# Altium PCB шах.PcbDoc
Units mm, origin at the board's own origin, x right, y up, seen from the top; angles counter-clockwise.
Board outline 204.72 x 122.3 mm, 2 copper layers (Top Layer, Bottom Layer); 68 components, 54 nets, 201 pads, 58 vias.
Unrouted connection lines stored in the file: 41.
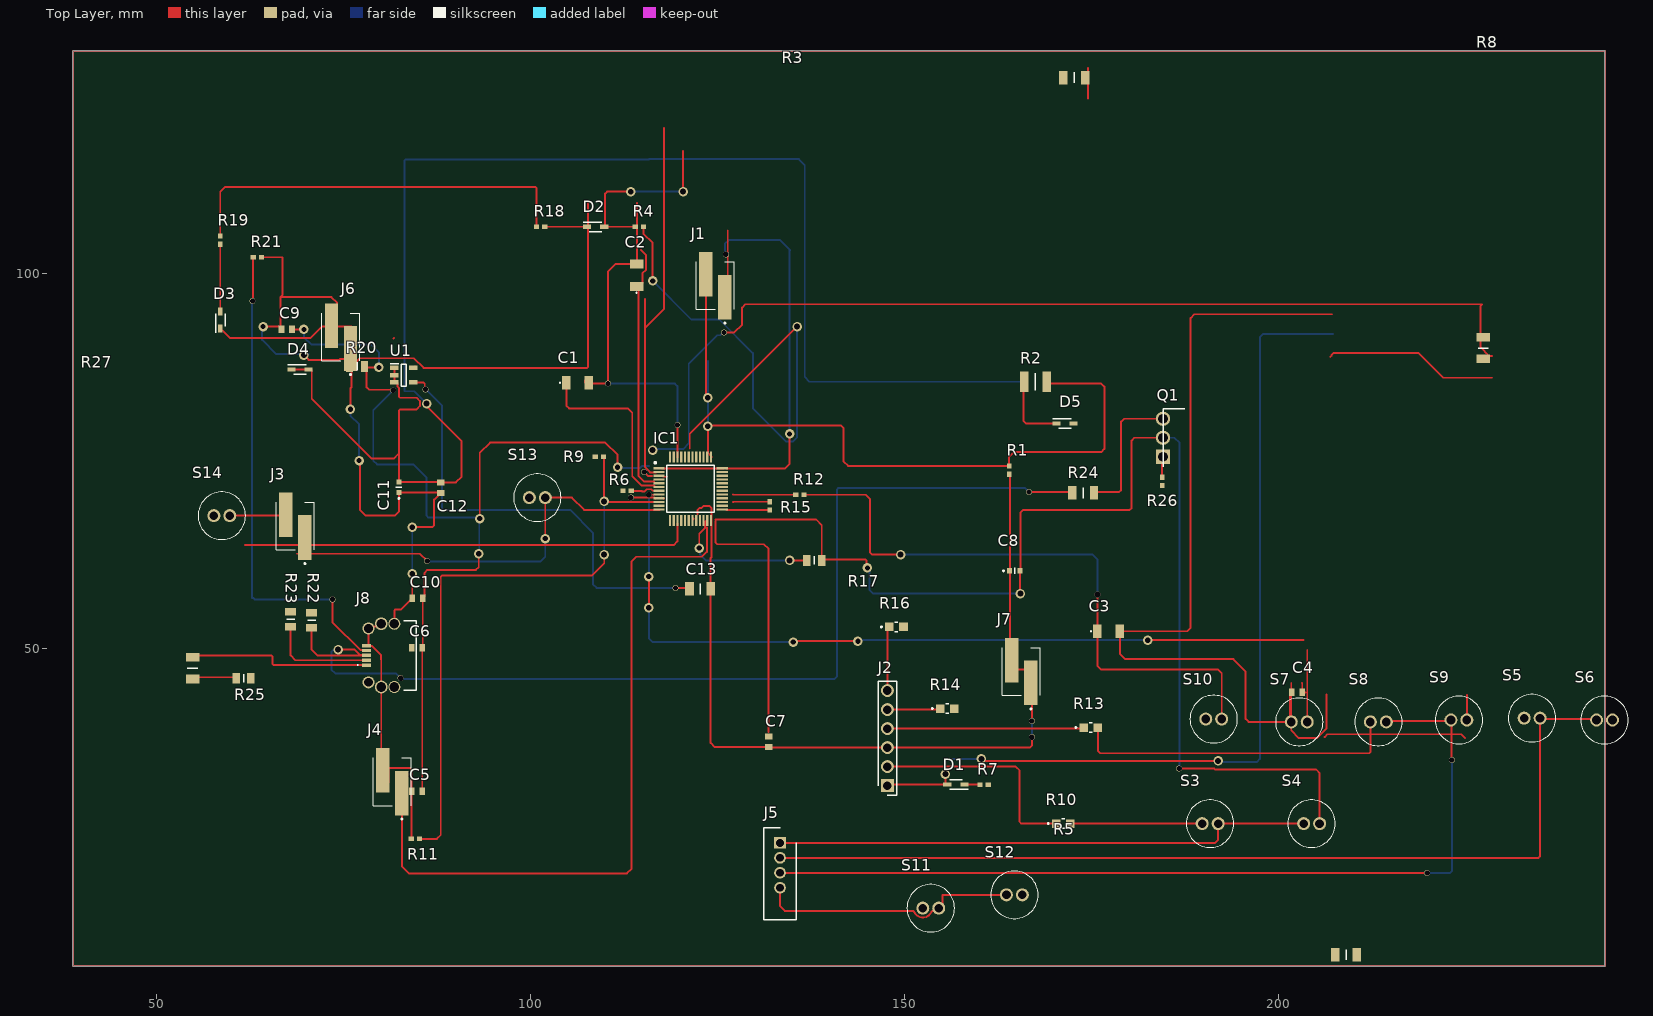
[diagram p0: Top Layer view]
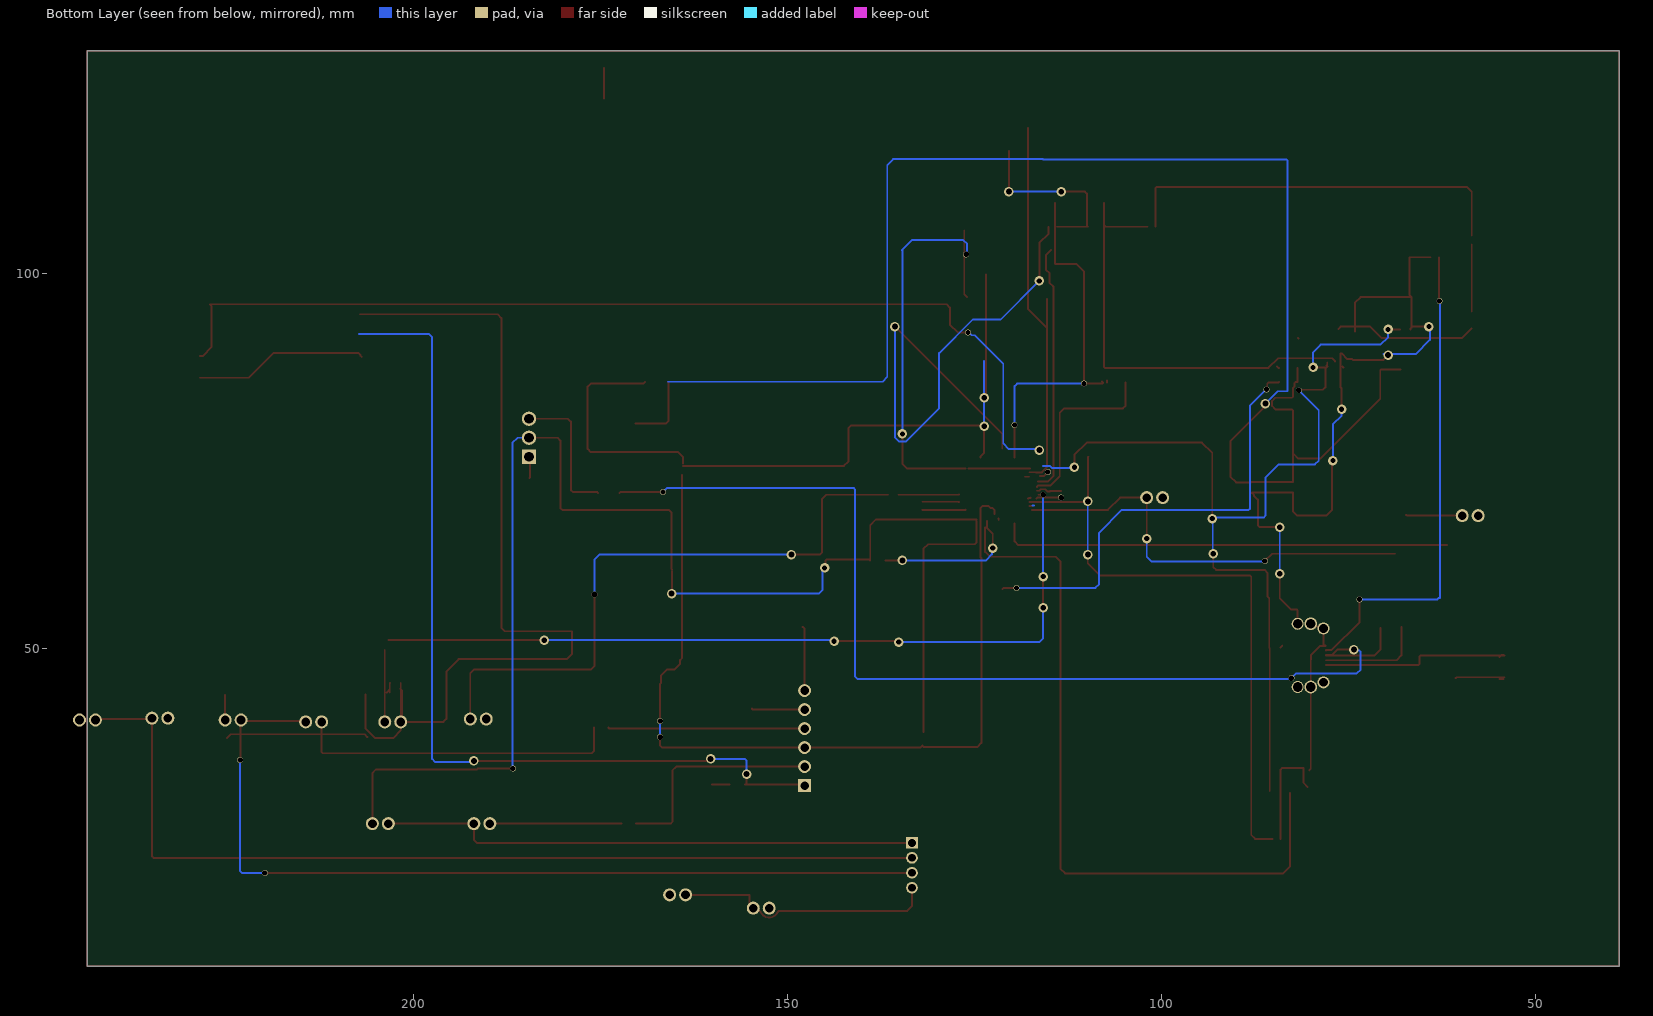
[diagram p1: Bottom Layer view, seen from below]
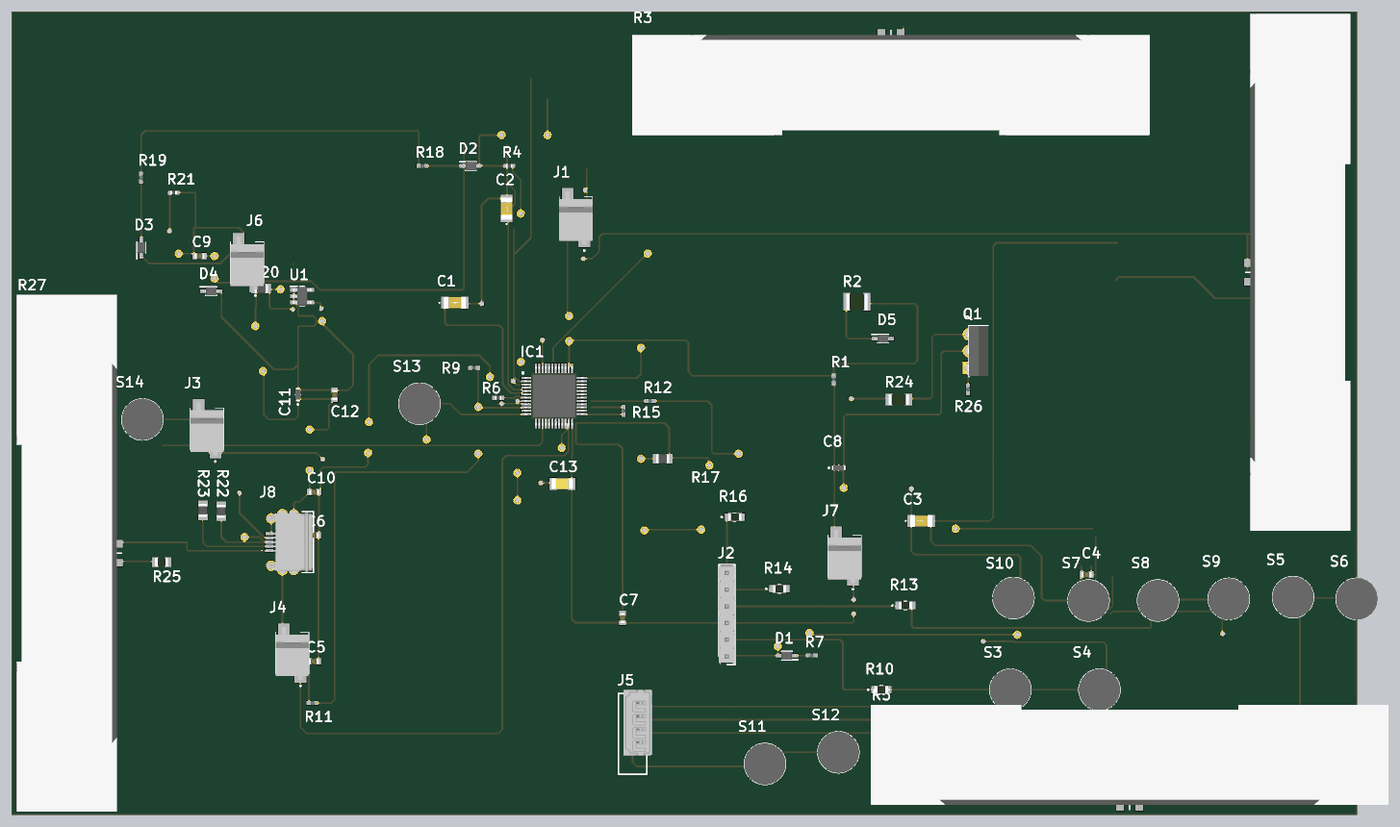
[diagram p2: 3D render of the assembled board from above, using the file's embedded part models]

## Layer stack, top to bottom
Top Solder: solder mask 0.0102, Solder Resist, Dk 3.5
Top Layer: signal copper 0.0356
Dielectric 1: dielectric 0.32, FR-4, Dk 4.8
Bottom Layer: signal copper 0.0356
Bottom Solder: solder mask 0.0102, Solder Resist, Dk 3.5

## Board outline
38.862,7.493 38.862,129.794 243.586,129.794 243.586,7.493

## Design rules (kind name [scope] priority, off if disabled: settings)
Clearance [All] p1: gap=0.254 ignorepadtopadclearanceinfootprint=FALSE
PolygonConnect [All] p1: connectstyle=Relief reliefconductorwidth=0.254 reliefentries=4 polygonreliefangle="90 Angle" airgapwidth=0.254
RoutingVias [All] p1: holewidth=0.711 width=1.27 viastyle="Through Hole" minholewidth=0.711 minwidth=1.27 maxholewidth=0.711 maxwidth=1.27
SolderMaskExpansion [All] p1: expansion=0.102 istentingtop=FALSE
SupplyNets "Schematic Supply Nets_3" [InNet('GND')] p1: voltage=0.000
SupplyNets "Schematic Supply Nets_2" [InNet('+3V3_ST_LINK')] p2: voltage=0.000
SupplyNets "Schematic Supply Nets_1" [InNet('E5V')] p3: voltage=0.000
SupplyNets "Schematic Supply Nets" [InNet('+3V3')] p4: voltage=0.000
Width [All] p1: maxlimit=0.254 minlimit=0.254 preferedwidth=0.254
30 further rules are at their usual default settings.

## Components (designator, comment, footprint, x,y, rotation, side; value= is the part's Value field where it differs from the comment)
C1 "C1206C200KCGACTU" C1206 106.299,85.471 r0 top
C2 "C1206C200KCGACTU" C1206 114.173,99.822 r90 top
C3 "C1206C200KCGACTU" C1206 177.259,52.248 r0 top
C4 "06035C104K4T4A" CAPC1608X90N 202.438,44.069 r0 top
C5 "06035C104K4T4A" CAPC1608X90N 84.836,30.861 r0 top
C6 "06035C104K4T4A" CAPC1608X90N 84.836,50.038 r0 top
C7 "06035C104K4T4A" CAPC1608X90N 131.826,37.465 r90 top
C8 "MAJCT168BB7105KTEA01" MAJx16 164.719,60.325 r0 top
C9 "06035C104K4T4A" CAPC1608X90N 67.437,92.583 r0 top
C10 "06035C104K4T4A" CAPC1608X90N 84.901,56.642 r0 top
C11 "MAJCT168BB7105KTEA01" MAJx16 82.423,71.501 r90 top
C12 "06035C104K4T4A" CAPC1608X90N 88.011,71.439 r90 top
C13 "KGM31GCG2J103JU" CAPC3316X145N 122.659,57.912 r0 top
D1 "BAT60JFILM" SOD2513X117N 156.842,31.75 r180 top
D2 "BAT60JFILM" SOD2513X117N 108.712,106.299 r0 top
D3 "BAT60JFILM" SOD2513X117N 58.547,93.853 r90 top
D4 "BAT60JFILM" SOD2513X117N 69.215,87.249 r0 top
D5 "BAT60JFILM" SOD2513X117N 171.45,80.01 r0 top
IC1 "STM32F103CBT6" QFP50P900X900X160-48N 121.389,71.278 r0 top
J1 "3-647166-2" 36471662 124.714,98.425 r0 top
J2 "22-28-4062" HDRV6W66P0X254_1X6_1524X249X838P 147.701,31.623 r90 top
J3 "3-647166-2" 36471662 68.58,66.29 r0 top
J4 "3-647166-2" 36471662 81.534,32.135 r0 top
J5 "53014-0410" SHDR4W60P0X200_1X4_1200X435X1000P 133.35,23.971 r90 top
J6 "3-647166-2" 36471662 74.676,91.563 r0 top
J7 "3-647166-2" 36471662 165.608,46.867 r0 top
J8 "204926-1103" 2049261103 81.28,49.022 r90 top
Q1 "BD139" TO254P290X760X1320-3P 184.531,75.565 r90 top
R1 "MCS04020D4701BE000" RESC1005X37N 163.957,73.787 r270 top
R2 "CRCW12102K70FKEAHP" RESC3225X70N 167.489,85.598 r0 top
R3 "CRMV1206AF10K0FKE5" RESC3216X74N 172.667,126.238 r0 top
R4 "SFR01MZPF1003" RESC1005X40N 114.554,106.299 r0 top
R5 "CRMV1206AF10K0FKE5" RESC3216X74N 208.989,9.017 r180 top
R6 "SFR01MZPF1003" RESC1005X40N 112.903,70.993 r180 top
R7 "MCS04020C1000FE000" RESC1005X37N 160.613,31.75 r0 top
R8 "CRMV1206AF10K0FKE5" RESC3216X74N 227.33,90.096 r90 top
R9 "MCS04020D4701BE000" RESC1005X37N 109.22,75.565 r0 top
R10 "ERA-6AHD220V" ERA6AEB1020V 171.196,26.543 r0 top
R11 "MCS04020D4701BE000" RESC1005X37N 84.624,24.511 r0 top
R12 "MCS04020C1000FE000" RESC1005X37N 136.017,70.485 r0 top
R13 "ERA-6AHD220V" ERA6AEB1020V 174.879,39.37 r0 top
R14 "ERA-6AHD220V" ERA6AEB1020V 155.702,41.91 r0 top
R15 "MCS04020C1000FE000" RESC1005X37N 131.953,69.003 r90 top
R16 "ERA-6AHD220V" ERA6AEB1020V 148.905,52.832 r0 top
R17 "WSL080500000ZEA9" RESC2013X84N 137.922,61.722 r0 top
R18 "MCS04020C1000FE000" RESC1005X37N 101.346,106.299 r0 top
R19 "MCS04020C1000FE000" RESC1005X37N 58.547,104.521 r270 top
R20 "WSL080500000ZEA9" RESC2013X84N 76.835,87.63 r0 top
R21 "SFR01MZPF1003" RESC1005X40N 63.5,102.235 r0 top
R22 "WSL080500000ZEA9" RESC2013X84N 70.739,53.721 r90 top
R23 "WSL080500000ZEA9" RESC2013X84N 67.945,53.848 r90 top
R24 "CRCW12061K50FKEAHP" RESC3116X65N 173.863,70.739 r0 top
R25 "TNPW080536K0BEEA" RESC2012X55N 61.656,45.974 r0 top
R26 "MCS04020C1000FE000" RESC1005X37N 184.404,72.263 r270 top
R27 "CRMV1206AF10K0FKE5" RESC3216X74N 54.864,47.318 r270 top
S3 "8631CQD2" 8631CQD2 189.767,26.543 r0 top
S4 "8631CQD2" 8631CQD2 203.327,26.543 r0 top
S5 "8631CQD2" 8631CQD2 232.791,40.64 r0 top
S6 "8631CQD2" 8631CQD2 242.472,40.386 r0 top
S7 "8631CQD2" 8631CQD2 201.676,40.132 r0 top
S8 "8631CQD2" 8631CQD2 212.246,40.132 r0 top
S9 "8631CQD2" 8631CQD2 223.012,40.386 r0 top
S10 "8631CQD2" 8631CQD2 190.246,40.513 r0 top
S11 "8631CQD2" 8631CQD2 152.429,15.24 r0 top
S12 "8631CQD2" 8631CQD2 163.605,17.018 r0 top
S13 "8631CQD2" 8631CQD2 99.851,70.104 r0 top
S14 "8631CQD2" 8631CQD2 57.687,67.691 r0 top
U1 "LD3985M33R" SOT95P280X145-5N 83.058,86.487 r0 top

## Footprints (in the part's own frame and the unit in brackets; to place one, negate y for a bottom-side part, rotate by r counter-clockwise, add the part's x,y. Pads: shape width x height; smd on the part's side, far side on the other; paste and mask are expansions set on the pad)
8631CQD2 [mm]
  round 1.74 hole 1.16: 1(0,0) 2(2.13,0)
  silkscreen extent -2.11,-3.17 4.24,3.17, body extent -2.11,-3.17 4.24,3.17, height 14.03
36471662 [mm]
  rect 1.78x5.97 smd: 1(1.27,-1.52) 2(-1.27,1.52)
  silkscreen extent -2.54,-5.1 2.54,3.17, body extent -2.54,-4.08 2.54,4, height 10.55
2049261103 [mm]
  rect 0.45x1.2 smd: 1(-1.3,3.225) 2(-0.65,3.225) 3(0,3.225) 4(0.65,3.225) 5(1.3,3.225)
  round 1.6 hole 1.17: MH1(-3.6,2.925) MH2(3.6,2.925)
  round 1.7 hole 1.3: MH3(-4.225,1.225) MH4(4.225,1.225)
  round 1.6 hole 1.3: MH5(-4.225,-0.525) MH6(4.225,-0.525)
  silkscreen extent -4.65,-3.47 4.65,4.4, body extent -4.65,-3.32 4.65,3.68, height 3.83
C1206 [mm]
  rect 1.15x1.8 smd: 1(-1.5,0) 2(1.5,0)
  silkscreen extent -2.4,-0.05 -2.3,0.05, body extent -1.7,-0.9 1.7,0.9, height 1.75
CAPC1608X90N [mm]
  rect 0.78x0.99 smd: 1(-0.7,0) 2(0.7,0)
  body extent -0.8,-0.41 0.8,0.41, height 0.9
CAPC3316X145N [mm]
  rect 1.17x1.82 smd: 1(-1.42,0) 2(1.42,0)
  silkscreen extent 0,-0.7 0,0.7, body extent -1.65,-0.8 1.65,0.8, height 1.68
ERA6AEB1020V [mm]
  rect 1.15x1.15 smd: 1(-0.95,0) 2(0.95,0)
  silkscreen extent -2.1,-0.63 0.2,0.63, body extent -1,-0.63 1,0.63, height 0.5
HDRV6W66P0X254_1X6_1524X249X838P [mm]
  rect 1.725x1.725 hole 1.15: 1(0,0)
  round 1.725 hole 1.15: 2(2.54,0) 3(5.08,0) 4(7.62,0) 5(10.16,0) 6(12.7,0)
  silkscreen extent -1.27,-1.24 13.97,1.24, body extent -1.27,-1.24 13.97,1.24, height 9.65
MAJx16 [mm]
  rect 0.7x0.7 smd: 1(-0.7,0) 2(0.7,0)
  silkscreen extent -1.6,-0.4 0,0.4, body extent -0.98,-0.4 0.98,0.4, height 0.9
QFP50P900X900X160-48N [mm]
  rect 1.475x0.3 smd: 1(-4.238,2.75) 2(-4.238,2.25) 3(-4.238,1.75) 4(-4.238,1.25) 5(-4.238,0.75) 6(-4.238,0.25) 7(-4.238,-0.25) 8(-4.238,-0.75) 9(-4.238,-1.25) 10(-4.238,-1.75) 11(-4.238,-2.25) 12(-4.238,-2.75) 25(4.238,-2.75) 26(4.238,-2.25) 27(4.238,-1.75) 28(4.238,-1.25) 29(4.238,-0.75) 30(4.238,-0.25) 31(4.238,0.25) 32(4.238,0.75) 33(4.238,1.25) 34(4.238,1.75) 35(4.238,2.25) 36(4.238,2.75)
  rect 0.3x1.475 smd: 13(-2.75,-4.238) 14(-2.25,-4.238) 15(-1.75,-4.238) 16(-1.25,-4.238) 17(-0.75,-4.238) 18(-0.25,-4.238) 19(0.25,-4.238) 20(0.75,-4.238) 21(1.25,-4.238) 22(1.75,-4.238) 23(2.25,-4.238) 24(2.75,-4.238) 37(2.75,4.238) 38(2.25,4.238) 39(1.75,4.238) 40(1.25,4.238) 41(0.75,4.238) 42(0.25,4.238) 43(-0.25,4.238) 44(-0.75,4.238) 45(-1.25,4.238) 46(-1.75,4.238) 47(-2.25,4.238) 48(-2.75,4.238)
  silkscreen extent -4.85,-3.15 3.15,3.62, body extent -4.5,-4.5 4.5,4.5, height 1.6
RESC1005X37N [mm]
  rect 0.7x0.6 smd: 1(-0.55,0) 2(0.55,0)
  body extent -0.5,-0.25 0.5,0.25, height 0.32
RESC1005X40N [mm]
  rect 0.7x0.6 smd: 1(-0.55,0) 2(0.55,0)
  body extent -0.5,-0.25 0.5,0.25, height 0.4
RESC2012X55N [mm]
  rect 1x1.45 smd: 1(-0.95,0) 2(0.95,0)
  silkscreen extent 0,-0.53 0,0.53, body extent -1,-0.63 1,0.63, height 0.55
RESC2013X84N [mm]
  rect 0.95x1.45 smd: 1(-1,0) 2(1,0)
  silkscreen extent 0,-0.54 0,0.54, body extent -1.01,-0.64 1.01,0.64, height 0.36
RESC3116X65N [mm]
  rect 1.1x1.8 smd: 1(-1.45,0) 2(1.45,0)
  silkscreen extent 0,-0.7 0,0.7, body extent -1.55,-0.8 1.55,0.8, height 0.65
RESC3216X74N [mm]
  rect 1.15x1.8 smd: 1(-1.45,0) 2(1.45,0)
  silkscreen extent 0,-0.7 0,0.7, body extent -39.37,-15.24 39.37,0, height 40.64
RESC3225X70N [mm]
  rect 1.1x2.7 smd: 1(-1.5,0) 2(1.5,0)
  silkscreen extent 0,-1.15 0,1.15, body extent -1.6,-1.25 1.6,1.25, height 0.7
SHDR4W60P0X200_1X4_1200X435X1000P [mm]
  rect 1.575x1.575 hole 1.05: 1(0,0)
  round 1.575 hole 1.05: 2(-2,0) 3(-4,0) 4(-6,0)
  silkscreen extent -10.3,-2.17 2,2.17, body extent -7.45,-2.96 2.55,1.39, height 5.85
SOD2513X117N [mm]
  rect 1.085x0.55 smd: 1(-1.14,0) 2(1.14,0)
  silkscreen extent -1.68,-0.64 0.83,0.64, body extent -1.25,-0.64 1.25,0.64, height 1.17
SOT95P280X145-5N [mm]
  rect 1.15x0.6 smd: 1(-1.25,0.95) 2(-1.25,0) 3(-1.25,-0.95) 4(1.25,-0.95) 5(1.25,0.95)
  silkscreen extent -1.83,-1.48 0.33,1.5, body extent -1.4,-1.48 1.4,1.48, height 1.45
TO254P290X760X1320-3P [mm]
  rect 1.92x1.92 hole 1.28: 1(0,0)
  round 1.92 hole 1.28: 2(2.54,0) 3(5.08,0)
  silkscreen extent -1.36,-2.9 6.44,0, body extent -1.26,-2.9 6.34,0.26, height 12.92

## Part data
C1 C2 C3: "Capacitor", Manufacturer_Name=KEMET, Datasheet Link=https://content.kemet.com/datasheets/KEM_C1009_C0G_HV_SMD.pdf, Manufacturer_Part_Number=C1206C200KCGACTU
C4 C5 C6 C7 C9 C10 C12: "Capacitor", Manufacturer_Name="Kyocera AVX", Mouser Part Number=581-06035C104K4T4A, Arrow Part Number=06035C104K4T4A, Arrow Price/Stock=https://www.arrow.com/en/products/06035c104k4t4a/avx, Datasheet Link=https://componentsearchengine.com/Datasheets/1/06031A100FAT2A.pdf, Height=0.9mm, Manufacturer_Part_Number=06035C104K4T4A, Mouser Price/Stock=https://www.mouser.co.uk/ProductDetail/KYOCERA-AVX/06035C104K4T4A?qs=NBj5Hwer2CEXBYKT%252BbuSBA%3D%3D
C8 C11: "Capacitor", Manufacturer_Name="TAIYO YUDEN", Datasheet Link=https://ds.yuden.co.jp/TYCOMPAS/or/detail?pn=MAJCT168BB7105KTEA01, Height=0.8mm, Manufacturer_Part_Number=MAJCT168BB7105KTEA01
C13: "Capacitor", Manufacturer_Name="Kyocera AVX", Mouser Part Number=581-KGM31GCG2J103JU, Datasheet Link=https://datasheets.kyocera-avx.com/HVKGM.pdf, Height=1.45mm, Manufacturer_Part_Number=KGM31GCG2J103JU, Mouser Price/Stock=https://www.mouser.co.uk/ProductDetail/KYOCERA-AVX/KGM31GCG2J103JU?qs=63Lh8XYXgjt6ivbLeGkCxg%3D%3D
D1 D2 D3 D4 D5: "Schottky Diode", Manufacturer_Name=STMicroelectronics, Mouser Part Number=511-BAT60JFILM, Arrow Part Number=BAT60JFILM, Arrow Price/Stock=https://www.arrow.com/en/products/bat60jfilm/stmicroelectronics?region=nac, Datasheet Link=https://www.mouser.jp/datasheet/2/389/cd00001944-1795661.pdf, Height=1.17mm, Manufacturer_Part_Number=BAT60JFILM, Mouser Price/Stock=https://www.mouser.co.uk/ProductDetail/STMicroelectronics/BAT60JFILM?qs=GnFZssByvVVVnMaukcyLZg%3D%3D
IC1: "Integrated Circuit", Manufacturer_Name=STMicroelectronics, Mouser Part Number=511-STM32F103CBT6, Arrow Part Number=STM32F103CBT6, Arrow Price/Stock=https://www.arrow.com/en/products/stm32f103cbt6/stmicroelectronics?region=europe, Datasheet Link=http://www.st.com/st-web-ui/static/active/en/resource/technical/document/datasheet/CD00161566.pdf, Height=1.6mm, Manufacturer_Part_Number=STM32F103CBT6, Mouser Price/Stock=https://www.mouser.co.uk/ProductDetail/STMicroelectronics/STM32F103CBT6?qs=WxFF5lh7QM3goh6GV5Ogig%3D%3D
J1 J3 J4 J6 J7: "Connector", Manufacturer_Name="TE Connectivity", Mouser Part Number=571-3-647166-2, Arrow Part Number=3-647166-2, Arrow Price/Stock=https://www.arrow.com/en/products/3-647166-2/te-connectivity?region=nac, Datasheet Link=https://www.te.com/commerce/DocumentDelivery/DDEController?Action=showdoc&DocId=Customer+Drawing%7F647166%7FR1%7Fpdf%7FEnglish%7FENG_CD_647166_R1.pdf%7F3-647166-2, Height=10.66mm, Manufacturer_Part_Number=3-647166-2, Mouser Price/Stock=https://www.mouser.co.uk/ProductDetail/TE-Connectivity/3-647166-2?qs=xsTFCgGnzbJU1qz6Np9kzA%3D%3D
J2: "Connector", Manufacturer_Name=Molex, Mouser Part Number=538-22-28-4062, Datasheet Link=https://datasheet.datasheetarchive.com/originals/distributors/SFDatasheet-1/sf-00031037.pdf, Height=8.38mm, Manufacturer_Part_Number=22-28-4062, Mouser Price/Stock=https://www.mouser.com/Search/Refine.aspx?Keyword=538-22-28-4062
J5: "Connector", Manufacturer_Name=Molex, Mouser Part Number=538-53014-0410, Datasheet Link=https://www.molex.com/pdm_docs/sd/530140410_sd.pdf, Height=10mm, Manufacturer_Part_Number=53014-0410, Mouser Price/Stock=https://www.mouser.co.uk/ProductDetail/Molex/53014-0410?qs=TLs3Kb%252BkMqKk8s1WRHwRGw%3D%3D
J8: "Connector", Manufacturer_Name=Molex, Mouser Part Number=538-204926-1103, Arrow Part Number=204926-1103, Arrow Price/Stock=https://www.arrow.com/en/products/204926-1103/molex?region=nac, Datasheet Link=https://www.molex.com/content/dam/molex/molex-dot-com/products/automated/en-us/salesdrawingpdf/204/204926/2049261103_sd.pdf, Height=4.65mm, Manufacturer_Part_Number=204926-1103, Mouser Price/Stock=https://www.mouser.co.uk/ProductDetail/Molex/204926-1103?qs=55YtniHzbhBOQihiQOeiLg%3D%3D
Q1: "Transistor BJT NPN", Manufacturer_Name=STMicroelectronics, Mouser Part Number=511-BD139, Arrow Part Number=BD139, Arrow Price/Stock=https://www.arrow.com/en/products/bd139/stmicroelectronics?region=europe, Datasheet Link=http://www.st.com/web/en/resource/technical/document/datasheet/CD00001225.pdf, Height=2.9mm, Manufacturer_Part_Number=BD139, Mouser Price/Stock=https://www.mouser.co.uk/ProductDetail/STMicroelectronics/BD139?qs=ljbEvF4DwOPW%2FLxHSWYMMA%3D%3D
R1 R9 R11: "Resistor", Manufacturer_Name=Vishay, Mouser Part Number=594-MCS04020D4701BE0, Datasheet Link=http://www.vishay.com/docs/28705/mcx0x0xpro.pdf, Height=0.37mm, Manufacturer_Part_Number=MCS04020D4701BE000, Mouser Price/Stock=https://www.mouser.co.uk/ProductDetail/Vishay-Beyschlag/MCS04020D4701BE000?qs=ft9OtscSA3%252BR0DpF5QqL2Q%3D%3D
R2: "Resistor", Manufacturer_Name=Vishay, Mouser Part Number=71-CRCW12102K70FKEAH, Datasheet Link=http://componentsearchengine.com/Datasheets/1/CRCW12102K70FKEAHP.pdf, Height=0.7mm, Manufacturer_Part_Number=CRCW12102K70FKEAHP, Mouser Price/Stock=https://www.mouser.co.uk/ProductDetail/Vishay-Dale/CRCW12102K70FKEAHP?qs=OAzHGkhREL0m0%252BU1n6AaAg%3D%3D
R3 R5 R8 R27: "Resistor", Manufacturer_Name=Vishay, Mouser Part Number=71-RMV1206AF10K0FKE5, Datasheet Link=https://www.vishay.com/docs/68037/crmv.pdf, Height=0.74mm, Manufacturer_Part_Number=CRMV1206AF10K0FKE5, Mouser Price/Stock=https://www.mouser.co.uk/ProductDetail/Vishay-Techno/CRMV1206AF10K0FKE5?qs=l8RvIzyJx4lLA%2F4RSSc%2F9A%3D%3D
R4 R6 R21: "Resistor", Manufacturer_Name="ROHM Semiconductor", Mouser Part Number=755-SFR01MZPF1003, Datasheet Link=https://fscdn.rohm.com/en/products/databook/datasheet/passive/resistor/chip_resistor/sfr-e.pdf, Height=0.4mm, Manufacturer_Part_Number=SFR01MZPF1003, Mouser Price/Stock=https://www.mouser.co.uk/ProductDetail/ROHM-Semiconductor/SFR01MZPF1003?qs=Mv7BduZupUj2RFL5gMaKTg%3D%3D
R7 R12 R15 R18 R19 R26: "Resistor", Manufacturer_Name=Vishay, Mouser Part Number=594-MCS04020C1000FE0, Arrow Part Number=MCS04020C1000FE000, Arrow Price/Stock=https://www.arrow.com/en/products/mcs04020c1000fe000/vishay, Datasheet Link=http://www.vishay.com/docs/28705/mcx0x0xpro.pdf, Height=0.37mm, Manufacturer_Part_Number=MCS04020C1000FE000, Mouser Price/Stock=https://www.mouser.co.uk/ProductDetail/Vishay-Beyschlag/MCS04020C1000FE000?qs=7ZE6F4QMOBYkwvQlfbkT8w%3D%3D
R10 R13 R14 R16: "Resistor", Manufacturer_Name=Panasonic, Mouser Part Number=667-ERA-6AHD220V, Datasheet Link=https://industrial.panasonic.com/cdbs/www-data/pdf/RDM0000/AOA0000C307.pdf, Height=0.6mm, Manufacturer_Part_Number=ERA-6AHD220V, Mouser Price/Stock=https://www.mouser.co.uk/ProductDetail/Panasonic/ERA-6AHD220V/?qs=MNPzkKEzRtQTWqg2JSKn2A%3D%3D
R17 R20 R22 R23: "Resistor", Manufacturer_Name=Vishay, Mouser Part Number=71-WSL080500000ZEA9, Arrow Part Number=WSL080500000ZEA9, Arrow Price/Stock=https://www.arrow.com/en/products/wsl080500000zea9/vishay?region=nac, Datasheet Link=https://ad.componentsearchengine.com/Datasheets/2/WSL080500000ZEA9.pdf, Height=0.838mm, Manufacturer_Part_Number=WSL080500000ZEA9, Mouser Price/Stock=https://www.mouser.co.uk/ProductDetail/Vishay-Dale/WSL080500000ZEA9?qs=f1l5vAGoKgsImKS87N8TmQ%3D%3D
R24: "Resistor", Manufacturer_Name=Vishay, Mouser Part Number=71-CRCW12061K50FKEAH, Arrow Part Number=CRCW12061K50FKEAHP, Arrow Price/Stock=https://www.arrow.com/en/products/crcw12061k50fkeahp/vishay?region=nac, Datasheet Link=http://componentsearchengine.com/Datasheets/1/CRCW12061K50FKEAHP.pdf, Height=0.65mm, Manufacturer_Part_Number=CRCW12061K50FKEAHP, Mouser Price/Stock=https://www.mouser.co.uk/ProductDetail/Vishay-Dale/CRCW12061K50FKEAHP?qs=k2%2FDWSARqgEwHXAQbL4aEg%3D%3D
R25: "Resistor", Manufacturer_Name=Vishay, Datasheet Link=https://www.vishay.com/docs/31006/tnpw.pdf, Height=0.55mm, Manufacturer_Part_Number=TNPW080536K0BEEA
S3 S4 S5 S6 S7 S8 S9 S10 S11 S12 S13 S14: "Switch (2-Pin Push)", Manufacturer_Name="C & K COMPONENTS", Mouser Part Number=611-8631-261, Datasheet Link=https://www.ckswitches.com/media/1396/8600.pdf, Height=13.93mm, Manufacturer_Part_Number=8631CQD2, Mouser Price/Stock=https://www.mouser.co.uk/ProductDetail/CK/8631CQD2?qs=ktcBc77oICXe9iPhfEwnkA%3D%3D
U1: "Integrated Circuit", Manufacturer_Name=STMicroelectronics, Mouser Part Number=511-LD3985M33R, Arrow Part Number=LD3985M33R, Arrow Price/Stock=https://www.arrow.com/en/products/ld3985m33r/stmicroelectronics?region=europe, Datasheet Link=http://www.st.com/st-web-ui/static/active/en/resource/technical/document/datasheet/CD00003395.pdf, Height=1.45mm, Manufacturer_Part_Number=LD3985M33R, Mouser Price/Stock=https://www.mouser.co.uk/ProductDetail/STMicroelectronics/LD3985M33R?qs=22WmWNTp1rrPOccVv4HZ7A%3D%3D

## Via types
v1: diameter 1.27, hole 0.711, Top Layer to Bottom Layer, 23 vias
v2: diameter 0.8, hole 0.711, Top Layer to Bottom Layer, 19 vias
v3: diameter 1.27, hole 0.8, Top Layer to Bottom Layer, 14 vias
v4: diameter 0.8, hole 0.8, Top Layer to Bottom Layer, 1 vias
v5: diameter 0.711, hole 0.711, Top Layer to Bottom Layer, 1 vias

## Nets (pads, with @x,y where several pads share a name; then routed paths per layer and width w, separated by ;. In a path a pad name is that pad's centre, name@x,y a point inside that pad or via, vN(x,y) a via of type N, cw(c..) or ccw(c..) an arc to the next point about the centre after c; other vN are vias at no path point)
+3V3: R9.1
+3V3_ST_LINK: C5.2 C6.2 C7.2 C8.2 C9.2 C10.2 IC1.1 IC1.9 IC1.24 IC1.36 IC1.48 J1.1 Q1.2 R17.2 R20.2 S4.2 U1.5 | length 394.4
  Top Layer w0.254: C9.2 v1@69.469,92.583 ; R20.2 77.962,87.503 R20.2@78.089,87.503 ; R20.2@77.852,88.138 77.852,87.867 R20.2@77.962,87.757 ; 78.089,84.836 R20.2@78.089,87.503 ; 78.105,84.836 78.425,84.516 81.581,84.516 v2(81.642,84.455) ; v1(79.756,87.503) R20.2@78.089,87.503 ; U1.5 84.393,87.437 U1.5@84.566,87.61 ; C5.2 85.536,49.973 85.601,50.038 C10.2 85.852,56.893 85.852,60.071 86.233,60.452 92.71,60.452 93.091,60.833 v1(93.091,62.611) ; v1(93.218,67.31) 93.218,76.073 94.615,77.47 109.982,77.47 111.633,75.819 v1(111.633,74.168) ; IC1.9@117.475,70.104 117.475,70.044 117.702,70.044 117.741,70.005 117.856,70.005 IC1.9@117.856,69.977 ; IC1.1@117.602,74.016 121.392,74.016 121.423,73.985 IC1.36@125.824,73.985 ; 124.701,67.009 124.701,65.712 124.714,65.699 124.714,64.135 124.968,63.881 131.191,63.881 131.829,63.243 131.829,38.803 131.826,38.8 ; 124.729,67.183 138.176,67.183 138.922,66.437 R17.2 ; J1.1 126.365,97.286 126.365,105.791 ; IC1.36@126.158,73.997 134.005,73.997 134.62,74.612 v1(134.62,78.613) ; R17.2@138.938,61.722 139.065,61.849 144.758,61.849 144.907,61.7 144.907,60.833 v1(145.034,60.706) ; v3@165.354,57.404 165.419,57.469 C8.2 ; C8.2@165.416,60.483 165.481,60.548 165.481,68.072 165.862,68.453 180.086,68.453 180.34,68.707 180.34,77.724 180.721,78.105 Q1.2 ; v2(186.69,33.909) 191.349,33.909 191.476,33.782 204.978,33.782 205.457,33.303 S4.2
  Bottom Layer w0.254: v1(69.723,92.583) 69.723,91.567 70.739,90.551 78.74,90.551 79.756,89.535 v1(79.756,87.503) ; v2(81.642,84.455) 78.994,81.807 78.994,75.057 79.502,74.549 84.328,74.549 86.106,72.771 86.106,67.691 86.36,67.437 93.091,67.437 v1(93.218,67.31) 93.154,67.246 93.154,62.674 v1(93.091,62.611) ; v1(111.633,74.168) 111.738,74.063 114.615,74.063 114.866,74.314 115.824,74.314 ; v2@125.984,102.616 125.984,104.013 126.492,104.521 133.35,104.521 134.714,103.157 ; v1(134.62,78.613) 134.62,103.124 ; v1(145.034,60.706) 145.288,60.452 145.288,57.785 145.796,57.277 v3(165.481,57.277) ; Q1.2 186.055,78.105 186.751,77.409 186.751,33.97 v2(186.69,33.909)
  other v2: 126.111,102.616
+3V_ST_LINK: R6.2
E5V: C11.2 C12.2 D4.1 D4.2 D5.1 D5.2 R2.1 U1.1 U1.2 U1.3 | length 218.6
  Top Layer w0.254: D4.1 70.623,87.249 70.771,87.101 70.771,83.324 78.784,75.311 81.701,75.311 82.296,75.906 ; U1.1 U1.2 U1.3 82.083,85.537 82.256,85.364 82.256,84.945 82.423,84.778 82.423,83.607 82.572,83.458 84.778,83.458 85.236,83 85.236,82.354 84.778,81.896 82.572,81.896 82.423,81.747 82.423,75.906 C11.2 87.949,72.201 C12.2 90.046,72.139 90.805,72.898 90.805,77.65 86.233,82.222 86.233,82.423 86.106,82.55 v3(86.106,82.677) ; R2.1 165.862,85.471 165.862,80.391 166.243,80.01 D5.1
  Bottom Layer w0.254: v3@85.979,82.804 84.46,84.323 83.185,84.323 83.185,115.167 83.334,115.316 115.824,115.316 115.846,115.338 135.868,115.338 136.652,114.554 136.652,86.233 137.287,85.598 165.989,85.598
GND: C1.2 C2.2 C3.2 C4.1 C5.1 C6.1 C7.1 C8.1 C9.1 C10.1 C11.1 C12.1 C13.2 D2.1 D2.2 IC1.8 IC1.20 IC1.23 IC1.35 IC1.47 J2.3 J4.2 J6.1 J6.2 J7.1 J7.2 J8.5 J8.MH2 J8.MH3 J8.MH4 J8.MH5 J8.MH6 R1.2 R3.1 R4.1 R5.2 R8.1 R11.1 R18.2 R21.2 S7.1 S9.2 | length 556.3
  Top Layer w0.254: R21.2 66.844,102.235 66.844,97.155 66.59,96.901 ; v1(64.262,92.964) 66.356,92.964 66.369,92.951 66.474,92.951 C9.1@66.59,92.835 ; C9.1 66.737,92.688 C9.1@66.59,92.835 ; v3(69.723,89.15) 70.358,88.515 74.418,88.515 74.508,88.605 75.183,88.605 J6.1@75.946,89.368 ; J6.2@74.168,92.329 74.168,96.139 73.406,96.901 66.59,96.901 ; v1(75.946,81.911) 75.946,84.728 76.056,84.838 J6.1@76.056,89.368 ; J6.1@76.791,88.324 77.202,88.736 84.423,88.736 85.722,87.437 107.55,87.437 107.699,87.586 107.699,90.784 107.699,106.426 107.699,109.474 ; v1@77.216,74.549 77.216,68.453 77.978,67.691 81.894,67.691 82.423,68.22 C11.1 C12.1@87.949,70.801 ; J8.MH4 79.664,53.247 79.296,52.88 78.613,52.88 J8.MH2 78.355,50.42 78.257,50.322 J8.5 78.099,50.278 78.813,50.278 80.01,49.081 80.01,48.514 80.055,48.469 J8.MH3 80.055,33.864 J4.2 ; J4.2@80.459,31.428 81.027,31.997 81.027,33.981 83.852,33.981 84.075,33.758 84.075,30.922 C5.1 84.075,30.8 84.075,27.472 84.074,27.471 R11.1 ; J8.MH6 81.805,55.016 81.954,55.164 82.723,55.164 C10.1 v1(84.201,59.944) v1@83.947,60.198 ; C6.1@83.873,50.326 84.136,50.063 C6.1 ; v1(84.201,66.167) 86.868,66.167 87.122,66.421 87.122,69.85 87.643,70.371 87.643,70.476 87.906,70.739 C12.1 ; R18.2 107.445,106.299 D2.1@107.572,106.426 ; C1.2@107.291,85.471 C1.2@107.291,85.796 ; C1.2@107.953,85.625 C1.2 107.926,85.344 v2(110.363,85.344) 110.363,100.33 111.355,101.322 C2.2 114.258,101.407 114.258,109.474 ; v1(113.411,110.998) 110.236,110.998 109.982,110.744 109.982,106.429 D2.2 R4.1 ; v2@119.634,79.756 119.634,79.043 119.639,79.038 119.639,75.516 119.67,75.485 ; v3@120.396,111.379 120.396,116.459 ; 122.336,67.923 122.336,68.488 122.555,68.707 122.831,68.707 123.085,68.961 123.952,68.961 124.17,68.743 124.17,62.119 124.079,62.028 C13.2 124.079,37.338 124.652,36.765 C7.1 ; C7.1@131.931,37.019 132.247,36.703 J2.3 166.751,36.703 167.005,36.957 v2(167.005,38.1) ; R1.2@164.084,73.134 164.084,48.641 J7.2 164.338,47.887 165.101,47.124 166.115,47.124 166.878,46.361 J7.1 167.005,45.22 v2(167.005,40.259) ; S7.1@201.422,39.63 201.475,39.683 S7.1@201.475,40.132 ; 201.676,45.345 C4.1@201.676,44.515 ; 201.738,44.577 C4.1@201.676,44.515 ; 206.121,38.1 206.502,38.481 224.409,38.481 224.888,38.002 ; 206.375,43.815 206.375,39.243 205.105,37.973 202.692,37.973 201.676,38.989 S7.1 ; 206.883,88.9 207.063,89.08 ; 207.01,89.133 207.285,89.408 218.694,89.408 221.975,86.127 228.473,86.127 ; 207.137,94.615 188.722,94.615 188.214,94.107 188.214,52.705 187.757,52.248 C3.2 178.759,49.219 179.464,48.514 193.929,48.514 195.58,46.863 195.58,40.535 195.983,40.132 S7.1@201.475,40.132 ; S9.2 225.142,43.717 ; C9.1@66.59,92.835 66.59,96.901 ; S7.1@201.475,40.132 201.475,44.314 C4.1@201.676,44.515 ; S7.1@201.475,40.132 S7.1 ; S7.1 C4.1@201.676,44.515
  Bottom Layer w0.254: v1@64.135,92.583 64.135,91.186 66.04,89.281 70.358,89.281 ; v1@75.928,81.898 75.928,81.044 77.089,79.883 v1(77.089,75.057) ; v1(84.201,59.944) v1(84.201,66.167) ; v2(110.363,85.344) 119.295,85.344 119.634,85.005 v2@119.634,79.756 ; v1@113.792,110.998 v3(120.396,110.998) ; v2(167.005,38.1) v2(167.005,40.259)
  other v2: 119.628,79.803
NetC1_1: C1.1 IC1.6 | length 24.4
  Top Layer w0.254: C1.1 104.799,82.399 105.156,82.042 113.03,82.042 113.599,81.473 113.599,72.964 114.833,71.73 116.455,71.73 IC1.6@116.649,71.536
NetC2_1: C2.1 IC1.5 | length 33.3
  Top Layer w0.254: 114.766,103.208 115.454,102.52 115.454,100.589 114.946,100.081 114.946,98.77 114.498,98.322 114.427,98.322 114.427,73.025 115.214,72.238 116.49,72.238
NetC3_1: C3.1 R12.2 S10.2 | length 84.3
  Top Layer w0.254: R12.2 144.78,70.485 145.383,69.882 145.383,62.761 145.66,62.484 v3(149.479,62.484) ; v4(175.768,57.15) 175.768,52.257 C3.1 175.759,47.634 176.276,47.117 191.897,47.117 192.376,46.638 S10.2
  Bottom Layer w0.254: v3(149.479,62.484) 175.133,62.484 175.768,61.849 v4(175.768,57.15)
NetC4_2: C4.2 IC1.7 R6.1 S7.2 | length 120.3
  Top Layer w0.254: R6.1 114.852,70.993 114.944,70.901 115.198,70.901 115.519,71.222 116.129,71.222 116.323,71.028 IC1.7@116.649,71.028 ; v1(115.824,55.372) v1@115.824,59.182 ; v1@135.128,50.673 v1(135.128,50.8) ; v1@135.509,50.927 v1(143.764,50.927) ; 183.134,51.054 203.327,51.054 ; 203.073,45.339 203.138,45.274 C4.2@203.138,44.472 ; C4.2 C4.2@203.138,44.472 ; 203.552,44.058 C4.2@203.138,44.472 ; S7.2 203.806,49.773
  Bottom Layer w0.254: v1(115.824,55.372) 115.824,51.308 116.332,50.8 v1(135.128,50.8) ; v1(115.824,59.563) 115.824,70.485 ; v1@144.018,51.054 v1(182.499,51.054)
NetC13_1: C13.1 U1.4 | length 60.8
  Top Layer w0.254: U1.4 84.374,85.471 85.725,85.471 85.875,85.321 85.875,84.686 v2(85.979,84.582) ; v2(119.38,58.039) 121.112,58.039 C13.1
  Bottom Layer w0.254: v2(85.979,84.582) 88.201,82.359 88.201,68.602 88.35,68.453 105.283,68.453 108.331,65.405 108.331,58.547 108.839,58.039 v2@119.322,58.039
NetD1_1: D1.1 R7.1 | length 2.3
  Top Layer w0.254: D1.1@157.728,31.75 R7.1 ; D1.1 D1.1@157.988,31.744
NetD1_2: D1.2 J2.1 R5.1 | length 118.8
  Top Layer w0.254: J2.1 147.828,31.75 D1.2@155.448,31.75 ; v3(155.448,33.147) 155.448,31.898 155.596,31.75 D1.2 ; v3@160.83,34.925 v3(191.897,34.925)
  Bottom Layer w0.254: v3@155.575,33.655 155.448,33.782 155.448,34.925 155.702,35.179 v3(160.274,35.179) ; v3(191.897,34.925) 192.024,34.798 197.104,34.798 197.485,35.179 197.485,91.567 197.866,91.948 207.264,91.948
NetD3_1: D3.1 R20.1 | length 19.3
  Top Layer w0.254: D3.1 59.82,91.44 70.612,91.44 72.136,92.964 76.089,92.964 76.089,92.893 76.327,92.655 ; R20.1@75.692,87.487 R20.1
NetD3_2: D3.2 R19.2 | length 9
  Top Layer w0.254: D3.2 R19.2
NetIC1_2: IC1.2 R3.2 | length 58.3
  Top Layer w0.254: 81.661,91.334 81.767,91.44 ; 115.316,96.647 115.316,74.168 115.999,73.485 116.768,73.485 116.78,73.497 IC1.2@117.682,73.497 ; 115.379,92.9 117.856,95.377 117.856,119.528 ; 174.519,123.444 174.519,127.508 R3.2@174.519,126.238
NetIC1_3: IC1.3 R8.2 | length 134.2
  Top Layer w0.254: v2(125.857,92.183) 127.235,92.183 128.27,93.218 128.27,95.504 128.718,95.952 203.856,95.952 227.192,95.952 226.938,95.698 226.938,91.546 226.938,90.237 228.148,89.027 228.473,89.027
  Bottom Layer w0.254: v3@116.455,76.581 120.396,76.581 121.158,77.343 121.158,88.011 124.951,91.804 125.331,91.804 125.709,92.183 v2(125.857,92.183)
  other v3: 116.332,76.454
NetIC1_10: IC1.10 R9.2 R11.2 | length 86.3
  Top Layer w0.254: R11.2 87.503,24.511 88.011,25.019 88.011,59.541 88.16,59.69 108.204,59.69 109.855,61.341 v3(109.855,62.484) ; R9.2 109.813,75.522 v3@109.813,69.85 ; v3@109.855,69.85 v3(109.855,69.596) 109.954,69.497 116.778,69.497 116.817,69.536 117.491,69.536 117.53,69.497 IC1.10@117.682,69.497 ; v2(113.411,70.104) 116.61,70.104 116.737,69.977 ; v5(115.824,70.485) 116.456,70.485
  Bottom Layer w0.254: v3(109.855,62.484) v3(109.855,69.596)
NetIC1_12: IC1.12 J3.1 S13.2 | length 57.8
  Top Layer w0.254: 68.815,62.611 69.85,62.611 85.217,62.611 86.18,61.648 v2(86.198,61.648) ; v1(101.981,64.643) S13.2 105.537,70.104 107.175,68.466 IC1.12@117.348,68.466
  Bottom Layer w0.254: v2(86.198,61.648) 86.251,61.595 101.346,61.595 101.981,62.23 v1(101.981,64.643)
NetIC1_13: IC1.13 J3.2 S14.2 | length 67.9
  Top Layer w0.254: S14.2 67.191,67.691 J3.2 ; 61.849,63.754 119.139,63.754 119.634,64.249 119.634,66.648
NetIC1_21: IC1.21 J4.1 R17.1 | length 114.7
  Top Layer w0.254: J4.1 82.804,20.828 83.742,19.89 112.882,19.89 113.527,20.536 113.527,61.584 114.148,62.205 122.911,62.205 123.571,62.865 123.571,66.13 ; v1(122.555,63.373) 122.555,65.274 123.344,66.063 123.344,66.989 ; v3@135.001,61.722 R17.1
  Bottom Layer w0.254: v1@122.682,62.992 122.682,62.738 122.66,62.716 122.66,62.506 123.444,61.722 v3(134.62,61.722)
NetIC1_25: IC1.25 R15.1 | length 5.8
  Top Layer w0.254: IC1.25@126.158,68.497 126.18,68.475 131.931,68.475 R15.1
NetIC1_27: IC1.27 R15.2 | length 4.9
  Top Layer w0.254: 127.084,69.497 127.14,69.553 R15.2
NetIC1_28: IC1.28
NetIC1_29: IC1.29 R12.1 | length 8
  Top Layer w0.254: 127.084,70.497 127.096,70.485 R12.1@135.128,70.485
NetIC1_38: IC1.38 IC1.39 J1.2 R1.1 R2.2 | length 105.7
  Top Layer w0.254: J1.2 123.444,83.841 123.698,83.587 v1(123.698,83.439) ; 124.17,75.485 124.17,75.604 123.701,76.073 123.701,77.533 123.698,77.536 v1(123.698,79.629) 123.802,79.733 124.097,79.733 124.12,79.756 141.478,79.756 141.859,79.375 141.859,74.93 142.452,74.337 R1.1 ; R1.1@163.957,74.676 163.957,75.565 164.592,76.2 176.276,76.2 176.689,76.613 176.689,84.931 176.276,85.344 169.243,85.344 R2.2
  Bottom Layer w0.254: v1@123.444,83.037 123.698,83.291 v1(123.698,83.439) ; v1(123.698,79.629) 123.698,88.371
NetIC1_44: IC1.44 R4.2 | length 77.2
  Top Layer w0.254: R4.2 115.104,105.368 116.332,104.14 v1@116.332,99.441 ; 121.283,76.635 121.283,78.651 135.596,92.964 v3(135.636,92.964)
  Bottom Layer w0.254: v1(116.332,99.06) 121.482,93.91 125.234,93.91 129.717,89.428 129.717,82.079 134.199,77.597 135.041,77.597 135.636,78.192 v3(135.636,92.964)
NetJ2_2: J2.2 R10.1 | length 29.7
  Top Layer w0.254: J2.2 164.846,34.163 165.354,33.655 165.354,26.797 165.608,26.543 R10.1
NetJ2_4: J2.4 R13.1 | length 26.3
  Top Layer w0.254: J2.4 173.802,39.243 R13.1
NetJ2_5: J2.5 R14.1 | length 7.1
  Top Layer w0.254: J2.5 154.625,41.783 R14.1
NetJ2_6: J2.6 R16.1 | length 8.6
  Top Layer w0.254: J2.6 147.701,52.578 R16.1
NetJ5_1: J5.1 S3.2 S4.1 | length 72.3
  Top Layer w0.254: J5.1 191.484,23.971 191.897,24.384 S3.2 S4.1
NetJ5_2: J5.2 S5.2 S6.1 | length 127.8
  Top Layer w0.254: J5.2 234.696,21.971 234.921,22.196 S5.2 235.048,40.513 242.345,40.513 S6.1
NetJ5_3: J5.3 S8.2 S9.1 | length 118.9
  Top Layer w0.254: J5.3 133.366,19.955 219.821,19.955 v2(219.837,19.939) ; S8.2 214.503,40.259 222.885,40.259 S9.1 223.075,40.322 223.075,35.115 v2(223.139,35.052)
  Bottom Layer w0.254: v2(219.837,19.939) 222.885,19.939 223.139,20.193 v2(223.139,35.052)
NetJ5_4: J5.4 S11.2 S12.1 | length 35.6
  Top Layer w0.254: J5.4 133.35,15.494 133.911,14.933 133.985,14.859 151.17,14.859 151.244,14.785 151.277,14.751 ccw(c152.429,15.24) 153.581,14.751 153.614,14.785 153.688,14.859 154.178,14.859 S11.2 ; S11.2@154.889,14.899 155.038,15.047 155.038,17.018 S12.1
NetJ8_2: J8.2 R23.1 | length 14.2
  Top Layer w0.254: R23.1 67.945,49.022 68.595,48.372 J8.2
NetJ8_3: J8.3 R22.1 R24.1 | length 142.7
  Top Layer w0.254: R22.1 70.739,49.784 71.501,49.022 J8.3 78.011,49.066 77.229,49.066 76.511,49.784 v3(74.295,49.784) ; v2(166.624,70.866) 172.286,70.866 R24.1
  Bottom Layer w0.254: v3@73.914,49.657 73.555,49.657 73.406,49.508 73.406,47.117 73.914,46.609 82.02,46.609 v2(82.646,45.983) 82.646,45.847 140.589,45.847 140.97,46.228 140.97,71.225 141.119,71.374 166.116,71.374 v2(166.624,70.866)
NetJ8_4: J8.4 R21.1 | length 65.5
  Top Layer w0.254: v2(62.865,96.393) 62.908,96.436 62.908,102.193 R21.1 ; v2(73.533,56.515) 73.533,53.48 77.297,49.716 78.011,49.716 J8.4
  Bottom Layer w0.254: v2(62.865,96.393) 62.801,96.329 62.801,56.706 62.95,56.706 63.141,56.515 v2(73.533,56.515)
NetQ1_1: Q1.1 R26.1 | length 2.9
  Top Layer w0.254: R26.1@184.488,72.729 R26.1 184.404,75.438 Q1.1
NetQ1_3: Q1.3 R24.2 | length 18.7
  Top Layer w0.254: R24.2 175.44,70.866 178.689,70.866 178.943,71.12 178.943,80.264 179.324,80.645 Q1.3
NetR10_2: R10.2 S3.1 | length 17.6
  Top Layer w0.254: R10.2 S3.1
NetR13_2: R13.2 S8.1 | length 43.8
  Top Layer w0.254: R13.2 175.829,36.261 176.149,35.941 212.09,35.941 212.246,36.097 S8.1
NetR18_1: R18.1 R19.1 | length 53.5
  Top Layer w0.254: R19.1@58.547,105.155 58.547,110.903 ; 58.547,110.998 59.182,111.633 100.647,111.633 100.796,111.484 R18.1
NetR25_1: R25.1 R27.2 | length 7.1
  Top Layer w0.254: R27.2@54.19,46.101 60.579,46.101 R25.1 ; R27.2@54.289,45.868 R27.2
NetS1_1: 
NetS2_1: 
NetS5_1: S5.1
NetS10_1: S10.1
NetS11_1: S11.1
NetS13_1: S13.1
NetS14_1: S14.1
U5V: J8.1 R27.1 | length 25.8
  Top Layer w0.254: R27.1@54.19,49.001 65.383,49.001 65.532,48.852 65.532,47.871 65.681,47.722 J8.1 ; R27.1@54.279,49.084 54.548,49.084 R27.1 R27.1@54.78,48.852
"USB DM": R23.2
"USB DP": R22.2
"USB RENUMn": R26.2
pads on no net: IC1.4 IC1.11 IC1.14 IC1.15 IC1.16 IC1.17 IC1.18 IC1.19 IC1.22 IC1.26 IC1.30 IC1.31 IC1.32 IC1.33 IC1.34 IC1.37 IC1.40 IC1.41 IC1.42 IC1.43 IC1.45 IC1.46 J8.MH1 R7.2 R14.2 R16.2 R25.2 S6.2 S12.2
copper on no net: | length 656.7
  Top Layer w0.254: v2(115.189,73.533) 115.745,72.977 116.229,72.977 ; 117.281,69.028 117.312,68.997 117.682,68.997 ; 117.729,72.898 118.237,72.898 ; 121.758,67.1 121.758,67.275 121.793,67.31 ; 38.862,7.493 243.586,7.493 243.586,129.794 38.862,129.794 38.862,7.493
  Bottom Layer w0.254: 117.027,69.028 117.281,69.028